# Altium PCB Internet Of Everthing.PcbDoc
Units mil, origin at the board's own origin, x right, y up, seen from the top; angles counter-clockwise.
Board outline 2472.44 x 1968.5 mil, 2 copper layers (Top Layer, Bottom Layer); 35 components, 31 nets, 136 pads, 45 vias.
Unrouted connection lines stored in the file: 2.
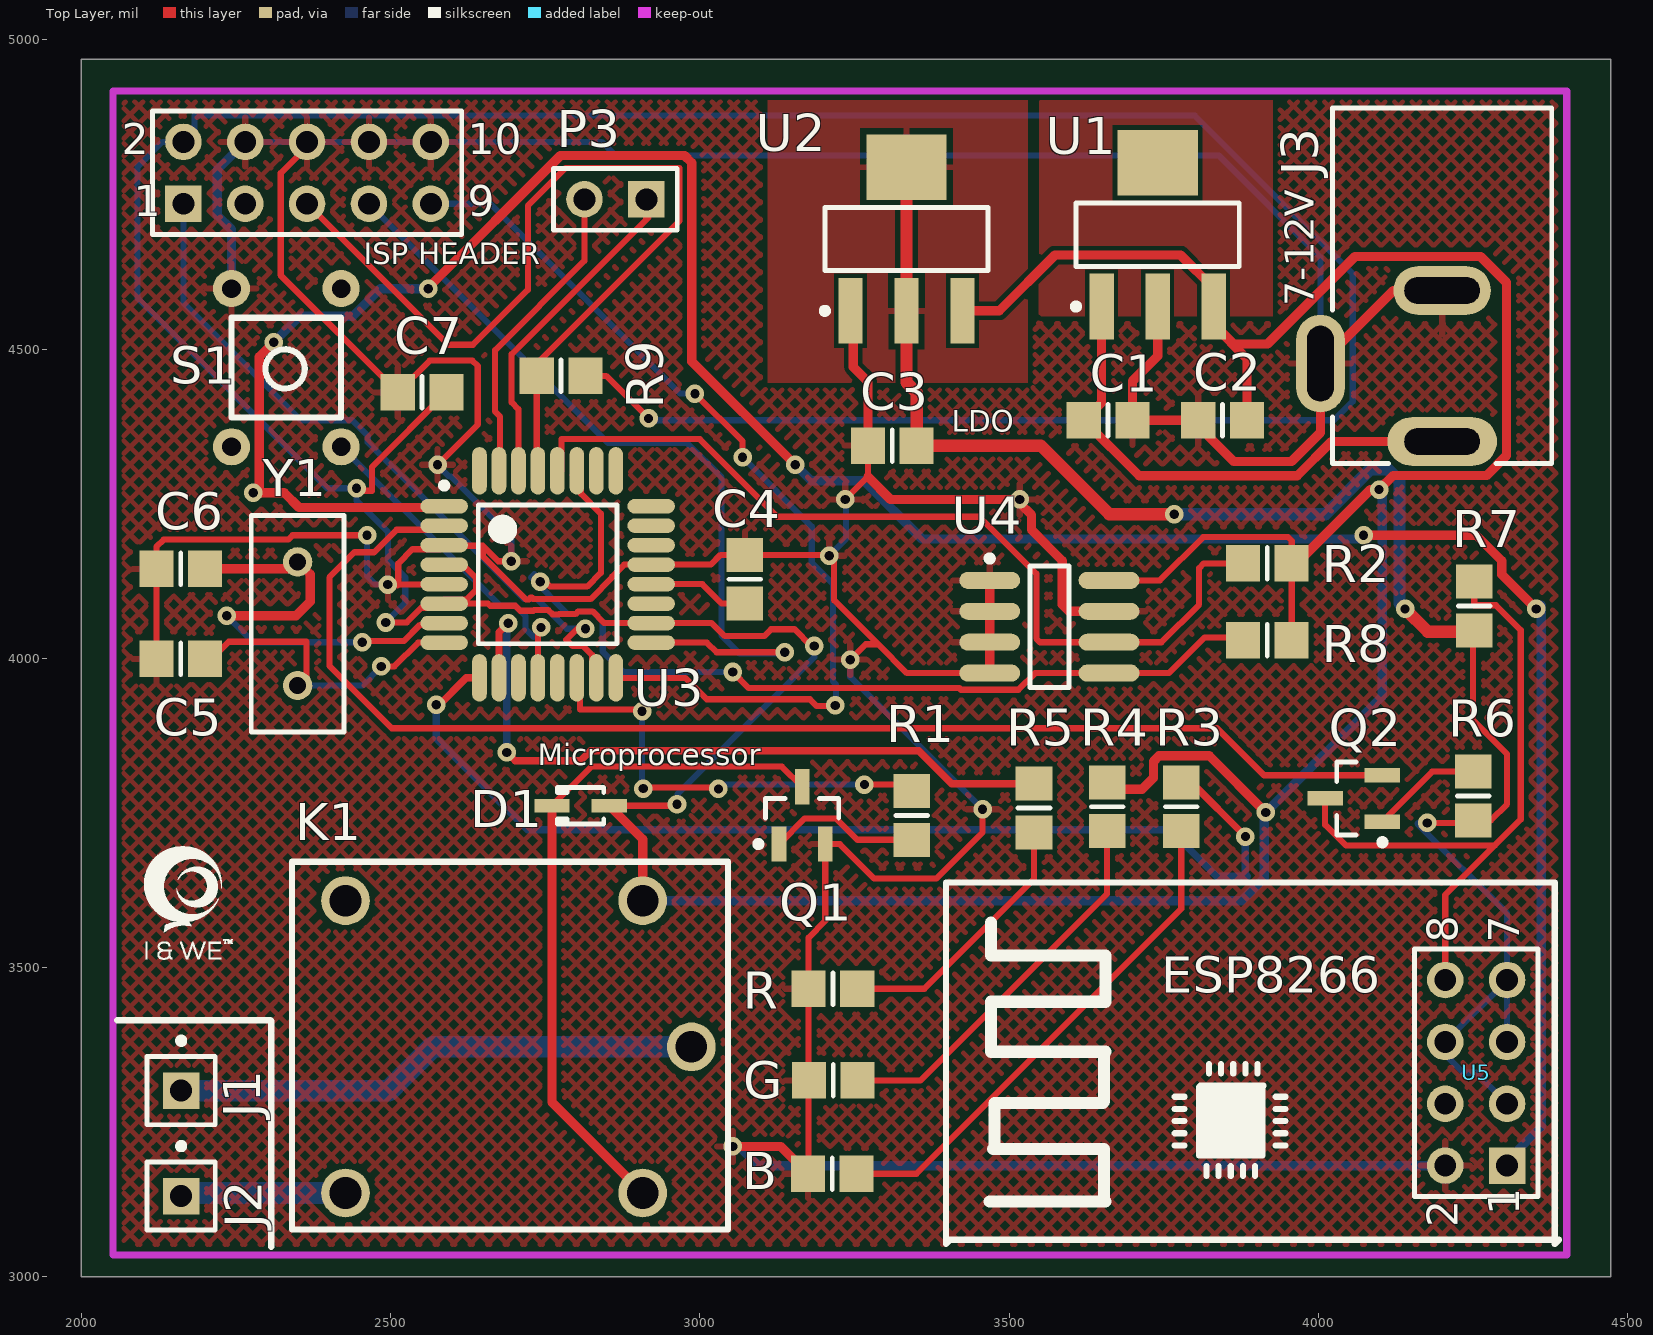
[diagram p0: Top Layer view]
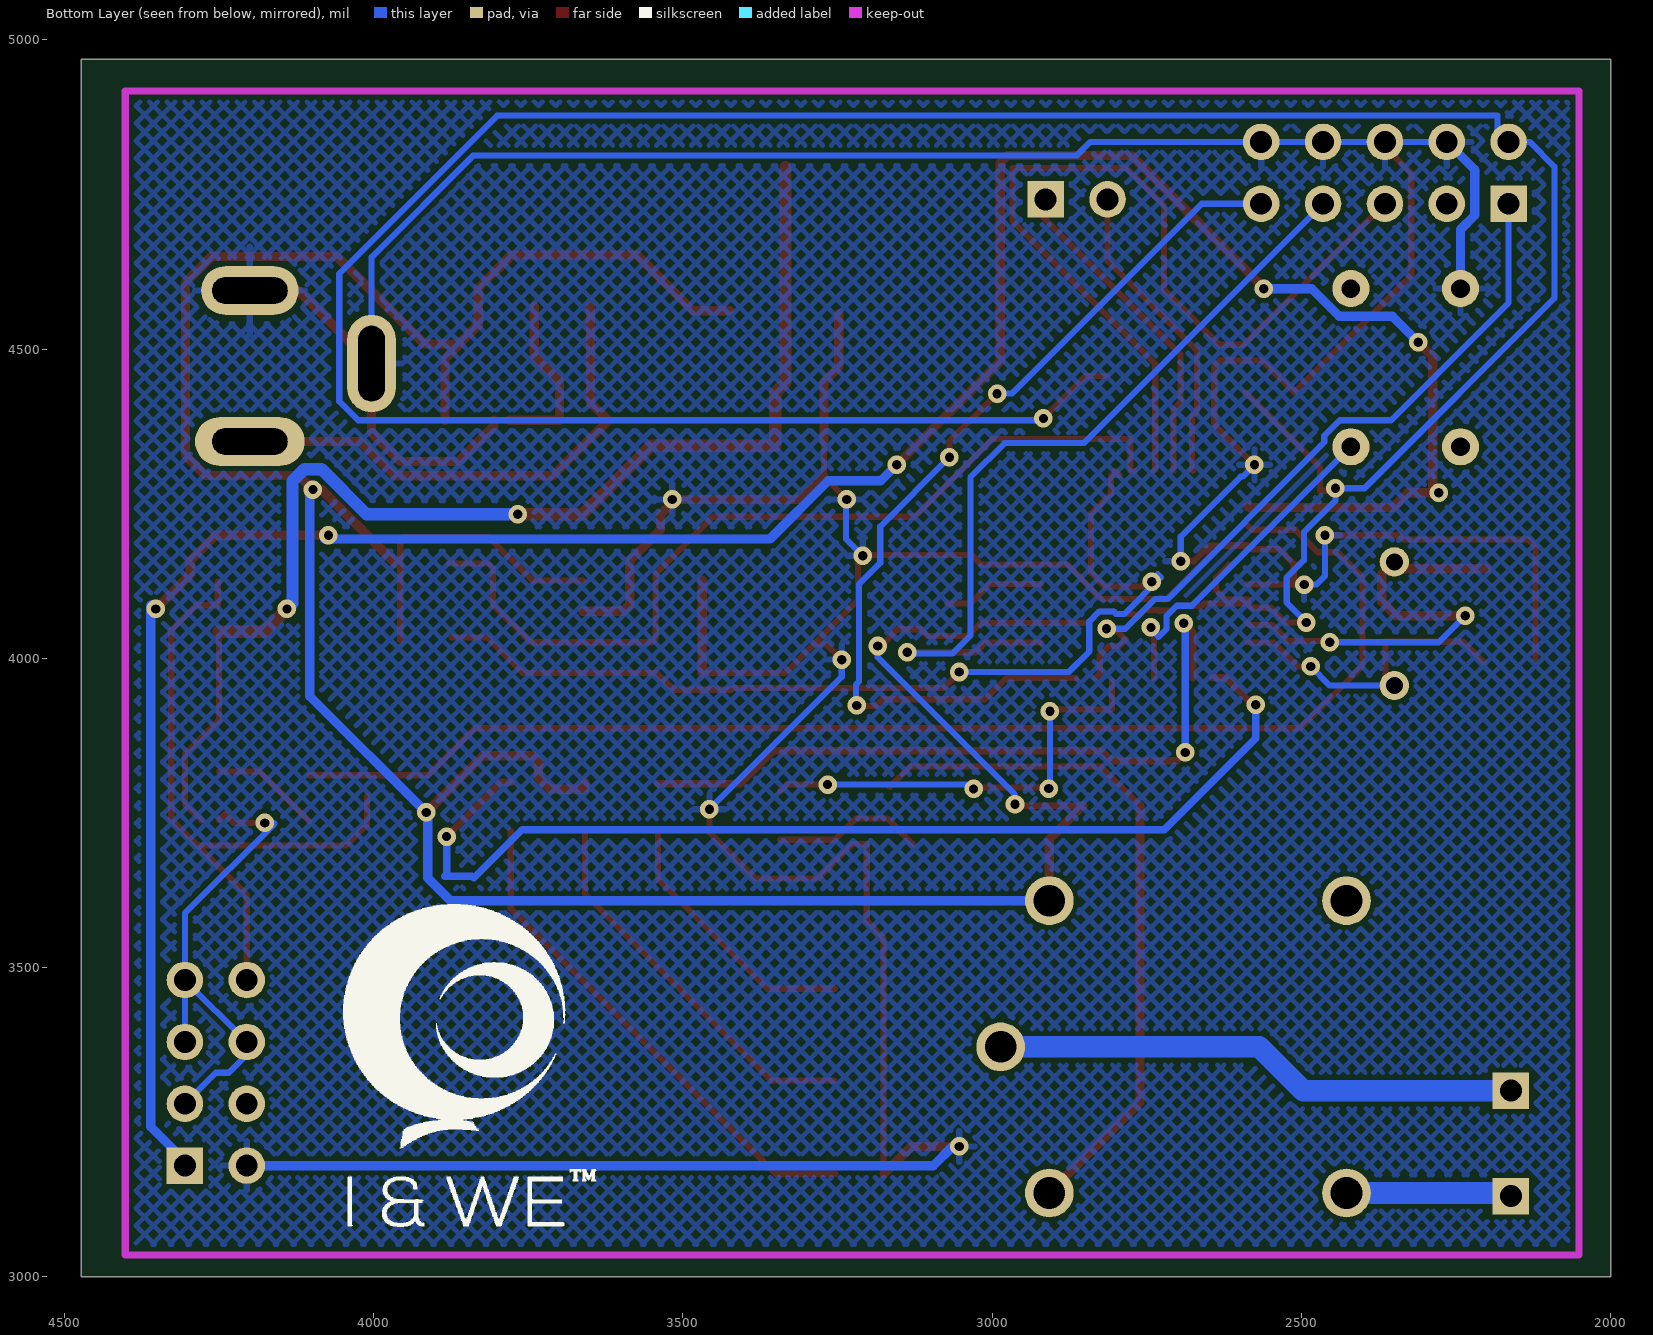
[diagram p1: Bottom Layer view, seen from below]

## Layer stack, top to bottom
Top Layer: signal copper 1.4
Dielectric: dielectric 12.6, FR-4, Dk 4.8
Bottom Layer: signal copper 1.4

## Board outline
2000,3000 4472.44,3000 4472.44,4968.5 2000,4968.5

## Design rules (kind name [scope] priority, off if disabled: settings)
Clearance [All] p1: gap=7.5
PolygonConnect [All] p1: connectstyle=Relief reliefconductorwidth=10 reliefentries=4 polygonreliefangle="90 Angle" airgapwidth=10
RoutingVias [All] p1: holewidth=15 width=30 viastyle="Through Hole" minholewidth=15 minwidth=30 maxholewidth=15 maxwidth=50
SolderMaskExpansion [All] p1: expansion=4
Width [All] p1: maxlimit=40 minlimit=8 preferedwidth=15
28 further rules are at their usual default settings.

## Components (designator, comment, footprint, x,y, rotation, side; value= is the part's Value field where it differs from the comment)
B "LED0" 6-0805_M 3214,3167 r180 top (schematic designator D2)
C1 "Cap" 6-0805_M 3660,4385 r180 top
C2 "Cap" 6-0805_M 3845,4385 r180 top
C3 "Cap" 6-0805_M 3311,4344 r180 top
C4 "Cap" 6-0805_M 3072.83,4127.95 r270 top
C5 "Cap" 6-0805_M 2160.79,3999.06 r180 top
C6 "Cap" 6-0805_M 2160.79,4144.73 r180 top
C7 "Cap" 6-0805_M 2551,4430 r0 top
D1 "1N4148" SOD-323 2807.09,3761.81 r180 top
G "LED0" 6-0805_M 3215.56,3317.85 r180 top (schematic designator D3)
"ISP HEADER" "ISP Header" HDR2X5 2165,4735 r0 top (schematic designator P2)
J1 "Socket" PIN1 2161.42,3301.18 r0 top
J2 "Socket" PIN1 2161.42,3130.83 r0 top
J3 "PWR2.5" KLD-0202 4200,4890 r270 top
K1 "Relay-SPDT" G5LA-141 2907.48,3608.27 r180 top
P3 "USART" HDR1X2 2913.39,4742.13 r180 top
Q1 "2N3904" SOT-23_M 3165.35,3746.06 r90 top
Q2 "2N3904" SOT-23_M 4057.09,3773.62 r180 top
R "LED0" 6-0805_M 3215,3466 r180 top (schematic designator D4)
R1 "Res2" 6-0805_M 3342.52,3746.06 r270 top
R2 "Res2" 6-0805_M 3917.32,4153.54 r0 top
R3 "Res2" 6-0805_M 3778.32,3760.09 r90 top
R4 "Res2" 6-0805_M 3658.24,3760.09 r90 top
R5 "Res2" 6-0805_M 3540.13,3758.13 r90 top
R6 "Res2" 6-0805_M 4250,3777.56 r90 top
R7 "Res2" 6-0805_M 4251.97,4084.65 r90 top
R8 "Res2" 6-0805_M 3917.32,4029.53 r0 top
R9 "g" 6-0805_M 2775.59,4456.69 r180 top
S1 "SW-PB" "Tactile Swithc" 2420,4342 r90 top
U1 "L7805CP" SOT223_M 3740,4685 r90 top
U2 "LM1117SX-3.3" SOT223_M 3334,4678 r90 top
U3 "ATmega328P-AU" 32A_M 2753.94,4135.83 r0 top
U4 "24C02C/SN" SOIC-SN8_M 3564.96,4051.18 r0 top
U5 "ESP8266" HDR2X4 4305,3180 r90 top
Y1 "16MHz" RAD-0.2 2349.76,4056.15 r90 top

## Footprints (in the part's own frame and the unit in brackets; to place one, negate y for a bottom-side part, rotate by r counter-clockwise, add the part's x,y. Pads: shape width x height; smd on the part's side, far side on the other; paste and mask are expansions set on the pad)
6-0805_M [mm] "Chip Resistor, Body 2.0x1.2mm, IPC Low Density"
  rect 1.4x1.5 smd: 1(-1,0) 2(1,0)
  silkscreen extent 0,-0.65 0,0.65, body extent -1.07,-0.7 1.07,0.7, height 0.7
32A_M [mm] "Thin QFP, 32-Leads, Body 7x7mm, Pitch 0.8mm, IPC Low Density"
  oval 1.95x0.6 smd: 1(-4.25,2.8) 2(-4.25,2) 3(-4.25,1.2) 4(-4.25,0.4) 5(-4.25,-0.4) 6(-4.25,-1.2) 7(-4.25,-2) 8(-4.25,-2.8) 17(4.25,-2.8) 18(4.25,-2) 19(4.25,-1.2) 20(4.25,-0.4) 21(4.25,0.4) 22(4.25,1.2) 23(4.25,2) 24(4.25,2.8)
  oval 0.6x1.95 smd: 9(-2.8,-4.25) 10(-2,-4.25) 11(-1.2,-4.25) 12(-0.4,-4.25) 13(0.4,-4.25) 14(1.2,-4.25) 15(2,-4.25) 16(2.8,-4.25) 25(2.8,4.25) 26(2,4.25) 27(1.2,4.25) 28(0.4,4.25) 29(-0.4,4.25) 30(-1.2,4.25) 31(-2,4.25) 32(-2.8,4.25)
  silkscreen extent -4.37,-2.85 2.85,3.77, body extent -3.5,-3.5 3.5,3.5, height 1.2
G5LA-141 [mm]
  round 2 hole 1.3: 1(-2,6) 2(12.2,0) 3(12.2,12) 4(0,0) 5(0,12)
  silkscreen extent -3.5,-1.6 14.4,13.5
HDR1X2 [mm] "Connector; Header; 2 Position"
  rect 1.5x1.5 hole 0.9: 1(0,0)
  round 1.5 hole 0.9: 2(2.54,0)
  silkscreen extent -1.27,-1.27 3.81,1.27
HDR2X4 [mm] "Connector; Header; 4x2 Position"
  rect 1.5x1.5 hole 0.9: 1(0,0)
  round 1.5 hole 0.9: 2(0,2.54) 3(2.54,0) 4(2.54,2.54) 5(5.08,0) 6(5.08,2.54) 7(7.62,0) 8(7.62,2.54)
  silkscreen extent -1.27,-1.27 8.89,3.81
HDR2X5 [mm] "Connector; Header; 5x2 Position"
  rect 1.5x1.5 hole 0.9: 1(0,0)
  round 1.5 hole 0.9: 2(0,2.54) 3(2.54,0) 4(2.54,2.54) 5(5.08,0) 6(5.08,2.54) 7(7.62,0) 8(7.62,2.54) 9(10.16,0) 10(10.16,2.54)
  silkscreen extent -1.27,-1.27 11.43,3.81
KLD-0202 [mm] "DC Power Jack, 2.5mm, KLD Series, PCB Mount"
  oval 2x4.5 hole 1.1 slot 3.1 at 90 deg: 1(13.7,0)
  round 0 all layers, no hole: 1A(13.7,-1.25) 1B(13.7,1.25) 2A(7.5,-1) 2B(7.5,1) 3A(9.5,-5) 3B(11.5,-5)
  oval 2x4 hole 1.1 slot 3.1 at 90 deg: 2(7.5,0)
  oval 4x2 hole 1.1 slot 3.1 at 0 deg: 3(10.5,-5)
  silkscreen extent 0,-4.5 14.6,4.5
PIN1 [mm] "Connector; Plug"
  rect 1.5x1.5 hole 0.9: 1(0,0)
  silkscreen extent -1.4,-1.4 1.4,2.17
RAD-0.2 [mm] "Radial Cap, Thru-Hole; 2 Leads; 0.2 in Pin Spacing"
  round 1.2 hole 0.7: 1(-2.54,0) 2(2.54,0)
  silkscreen extent -4.44,-1.91 4.45,1.9
SOD-323 [mm] "SOD-323/SC-76; 2 Leads; Body 1.7 x 1.3 mm, (LxW)"
  rect 1.45x0.55 smd: 1(1.175,0) 2(-1.175,0)
  silkscreen extent -0.95,-0.75 0.95,0.75
SOIC-SN8_M [mm] "SOIC, 8-Leads, Body 4.9x3.8mm, Pitch 1.27mm, IPC Low Density"
  oval 2.5x0.7 smd: 1(-2.45,1.905) 2(-2.45,0.635) 3(-2.45,-0.635) 4(-2.45,-1.905) 5(2.45,-1.905) 6(2.45,-0.635) 7(2.45,0.635) 8(2.45,1.905)
  silkscreen extent -2.57,-2.5 0.8,2.93, body extent -2,-2.5 2,2.5, height 1.75
SOT223_M [mm] "SOT223, 4-Leads, Body 6.5x3.5mm, Pitch 2.3mm, Lead Span 7mm, IPC Low Density"
  rect 2.7x1 smd: 1(-2.95,2.3) 2(-2.95,0) 3(-2.95,-2.3)
  rect 2.7x3.3 smd: 4(2.95,0)
  silkscreen extent -3.07,-3.35 1.3,3.47, body extent -1.85,-3.35 1.85,3.35, height 1.7
SOT-23_M [mm] "SOT23, 3-Leads, Body 2.9x1.3mm, Pitch 0.95mm, Lead Span 2.3mm, IPC Low Density"
  rect 1.45x0.6 smd: 1(-1.175,0.95) 2(-1.175,-0.95) 3(1.175,0)
  silkscreen extent -1.3,-1.5 0.7,1.92, body extent -0.7,-1.5 0.7,1.5, height 1.11
"Tactile Swithc" [mil]
  round 60 hole 30: 1(0,0) 2(255.91,177.17) ""(0,177.17) ""(255.91,0)
  silkscreen extent 47,0 209,177

## Part data
B G R: "Typical INFRARED GaAs LED"
C1 C2 C3 C4 C5 C6 C7: "Capacitor"
D1: "High Conductance Fast Diode"
"ISP HEADER": library part "Header 5X2", "Header, 5-Pin, Dual row"
J3: "Low Voltage Power Supply Connector"
K1: "Single-Pole Dual-Throw Relay"
P3: library part "Header 2", "Header, 2-Pin"
Q1 Q2: "NPN General Purpose Amplifier"
R1 R2 R3 R4 R5 R6 R7 R8: "Resistor"
R9: library part Res2, "Resistor"
S1: "Switch"
U1: "Positive Voltage Regulator"
U2: "800mA Low-Dropout Linear Regulator, 3-pin TO-263"
U3: "8-bit AVR Microcontroller, 32KB Flash, 1KB EEPROM, 2KB SRAM, 32-pin TQFP, Industrial Grade (-40°C to 85°C)"
U4: "2Kbit, 400kHz, 5V, I2C Serial EEPROM, 8-Pin SOIC 150mil, Commercial Temperature"
U5: "Low cost, Wi-Fi module"
Y1: library part XTAL, "Crystal Oscillator"

## Via types
v1: diameter 30, hole 15, Top Layer to Bottom Layer, 45 vias

## Nets (pads, with @x,y where several pads share a name; then routed paths per layer and width w, separated by ;. In a path a pad name is that pad's centre, name@x,y a point inside that pad or via, vN(x,y) a via of type N, cw(c..) or ccw(c..) an arc to the next point about the centre after c; other vN are vias at no path point)
3V3: C3.1 R6.1 R7.1 U2.2 U2.4 U5.3 U5.5 U5.6 U5.7 | length 2804.6
  Top Layer w10: v1(4176,3734) 4226.19,3734 4240.19,3748 R6.1 ; R7.1@4250,4043.31 4250,3900.02 4305,3845.02 4305,3764.47 R6.1@4278.72,3738.19
  Top Layer w20: U2.4 U2.2 3334,4446 3350.37,4429.63 C3.1 3551,4344 3662,4233 v1(3767,4233) ; v1(4140,4080) 4176.69,4043.31 R7.1@4250,4043.31
  Bottom Layer w10: v1(4176,3734) 4161,3734 4160,3733 4305,3588 U5.7 ; U5.3 4255,3330 4234,3330 4205,3359 U5.6 U5.7 ; U5.5 U5.7
  Bottom Layer w20: v1(3767,4233) 4011.33,4233 4084.33,4306 4111.67,4306 4131,4286.67 4131,4089 v1(4140,4080)
5V0: "ISP HEADER.2" C2.1 C7.2 D1.2 K1.4 R2.2 R4.2 R8.2 R9.1 U1.3 U2.3 U3.4 U3.6 U3.18 U4.8 | length 10826.6
  Top Layer w10: v1(2445,4275) 2449,4271 2470,4271 2470,4309.63 C7.2 ; v1(2492,4058) 2526,4058 2525.93,4058.07 2549.76,4081.9 2579.93,4081.9 U3.6 ; U3.4@2616.78,4151.57 2638,4130.36 2638,4109.8 2623.47,4095.27 2586.61,4095.27 U3.6 ; R9.1 2848.31,4456.69 v1(2917,4388) ; D1.2 2960.81,3761.81 v1(2963,3764) ; v1(3185,4020) 3180,4020 3153,4047 3115,4047 3104,4036 3040,4036 3018.91,4057.09 2845.51,4057.09 2826.6,4076 2803.4,4076 2799,4071.6 2772.4,4071.6 2771.8,4071 2761.85,4071 2754.85,4078 2731.65,4078 2730.65,4077 2709.6,4077 2701.6,4085 2661,4085 2657.42,4088.58 U3.6 ; U4.8 3743.64,4126.18 3813.53,4196.07 3950.93,4196.07 3956.69,4190.31 R2.2 R8.2
  Top Layer w15: D1.2 2907.48,3707.68 K1.4 ; U2.3 3483.86,4561.86 3574,4652 3777,4652 3830.55,4598.45 U1.3 U1.3@3830.55,4540.45 ; R4.2 3658.24,3788.24 3714.7,3788.24 3733.29,3806.82 3733.29,3833.44 3742.37,3842.52 3823.48,3842.52 v1(3915,3751) ; C2.1 3884.37,4484.63 3830.55,4538.45 U1.3@3830.55,4540.45 ; R2.2@3964.54,4153.54 4084,4273 v1(4098,4273) 4120.76,4295.76 4271.94,4295.76 4304.08,4327.9 4304.08,4607.61 4262.1,4649.59 4059.16,4649.59 3917.78,4508.21 3862.79,4508.21 U1.3@3830.55,4540.45
  Bottom Layer w10: v1(2492,4058) 2492,4058.53 2523.62,4090.16 2523.62,4130.98 2496,4158.6 2496,4203.89 2445,4254.89 v1(2445,4275) 2398,4275 2091,4582 2091,4795 2131,4835 2165,4835 2183,4835 2183,4877.53 3799.93,4877.53 4055.52,4621.94 4055.52,4415.55 4024.84,4384.87 2917,4384.87 v1(2917,4388) ; v1(2963,3764) 2964,3765 2964,3781 3185,4002 v1(3185,4020)
  Bottom Layer w15: K1.4 3875.67,3608.27 3912.5,3645.09 3912.5,3748.5 v1(3915,3751) 4103,3939 4103,4268 v1(4098,4273)
GND: "ISP HEADER.4" "ISP HEADER.6" "ISP HEADER.8" "ISP HEADER.10" B.2 C1.1 C2.2 C3.2 C4.1 C5.2 C6.2 C7.1 G.2 J3.2 J3.2A J3.2B J3.3 J3.3A J3.3B Q1.2 R.2 S1.2 U1.2 U2.1 U3.3 U3.5 U3.21 U4.1 U4.2 U4.3 U4.4 U4.7 U5.2 | length 9867.4
  Top Layer w10: C5.2 C6.2 2121.42,4180.42 2132.99,4191.99 2334.52,4191.99 2341.53,4199 v1(2462,4199) ; 2365,4827 2322.47,4784.47 2322.47,4620.47 2321.82,4619.81 C7.1 2563,4481.37 2632.37,4481.37 2641,4472.74 2641,4378 v1(2576,4313) ; v1(2495.62,4119.38) 2512.38,4119.38 ; 2511,4118 2512.38,4119.38 ; U3.5 2585.91,4119.38 2512.38,4119.38 ; U3.3@2587.69,4182 2649,4182 2649,4165.4 2719.4,4095 2723.2,4095 2726.2,4098 2728.4,4098 2730.4,4096 2823.2,4096 2858,4130.8 2858,4132 2877.57,4151.57 3017.57,4151.57 3033.32,4167.32 C4.1 3207.68,4167.32 v1(3209,4166) 3217,4158 3217,4094 3288,4023 ; U3.3@2622.51,4183.07 U3.3 2579.93,4176.39 2535.39,4176.39 2512.38,4153.38 2512.38,4119.38 ; 2650,4181 2674,4157 v1(2695,4157) ; B.2 3175.63,3168 R.2 3175.63,3548.63 3202.76,3575.76 Q1.2 3226.2,3699.8 3282,3644 3382,3644 3457,3719 v1(3457,3756) ; v1(3235,4257) 3271.63,4293.63 C3.2 C3.2@3271.63,4352 ; v1(3243,3998) 3268,4023 3288,4023 ; U4.4 3334.82,3976.18 3288,4023
  Top Layer w15: v1(3053,3211) 3130.63,3211 B.2 ; U2.1@3248,4557.31 3248,4470.98 3271.63,4447.35 C3.2@3271.63,4352 ; 3271.63,4293.63 3308.26,4257 v1(3517,4257) ; U4.4 U4.3 U4.2 U4.1 ; v1@3517,4251 3536,4232 3536,4208 3586,4158 3586,4087 3596.82,4076.18 U4.7 ; U1.2 3740,4489 3699.37,4448.37 C1.1 C2.2@3780.63,4385 ; C2.2 3805.63,4375.65 3863,4318.28 3956.28,4318.28 4003.15,4365.15 J3.3B ; J3.3A 4022.83,4496.3 J3.3 4121.26,4594.72 J3.2A
  Bottom Layer w10: 2265,4835 2365,4835 2465,4835 2565,4835 2841,4835 2863,4813 3839,4813 4003.15,4648.85 J3.3 ; v1(2462,4199) 2462,4133 2475.62,4119.38 v1(2495.62,4119.38) ; v1(2576,4313) 2595,4294 2598,4294 2695,4197 v1(2695,4157) ; v1(3209,4166) 3236,4193 3236,4257 v1(3235,4257) ; v1(3243,3998) 3243,3970 v1(3457,3756)
  Bottom Layer w15: S1.2 2242.83,4693.49 2219.97,4716.35 2219.97,4789.97 2265,4835 ; v1(3053,3211) 3064,3211 3095,3180 U5.2
LED1: R3.2 U3.9 | length 1762.6
  Top Layer w12: v1(2574,3925) 2577,3923 2622.5,3968.5 U3.9 ; R3.2 3794.54,3799.46 v1(3882,3712)
  Bottom Layer w12: v1@2568,3919 v1(2574,3925) 2574,3871 2722,3723 3760,3723 3838,3645 3841,3648 3885,3648 3882,3651 v1(3882,3712)
LED2: R5.2 U3.10 | length 1196.9
  Top Layer w12: U3.10 2675.2,4042.2 v1(2690,4057) ; v1(2688,3848) 2701.13,3834.87 2807.72,3834.87 2823.85,3851 3353.84,3851 3407.34,3797.5 R5.2
  Bottom Layer w12: v1(2688,3848) 2688,4058 2690,4060 v1(2690,4057)
LOAD: R1.1 U3.14 | length 722.1
  Top Layer w10: U3.14@2806,3963.69 2806,3917.62 2903.38,3917.62 v1(2906.5,3914.5) ; v1(2908.5,3789.5) 2910.5,3791.5 3027.5,3791.5 v1(3030,3789) ; v1(3266,3796) 3331.95,3796 R1.1
  Bottom Layer w10: v1(2906.5,3914.5) 2906.5,3790.5 2908.5,3790.5 v1(2908.5,3789.5) ; v1(3030,3789) 3030,3796 v1(3266,3796)
MISO: "ISP HEADER.9" U3.16 | length 1525.7
  Top Layer w10: U3.16 2976.5,3968.5 3011,3934 3178,3934 3189,3923 3218,3923 v1(3219,3924) ; v1(2992,4428) 3069,4351 v1(3069,4325)
  Bottom Layer w10: 2565,4735 2661,4735 2968,4428 v1(2992,4428) ; v1(3069,4325) 3181,4213 3181,4154.4 3215,4120.4 3215,3963 3220,3958 v1@3220,3925
MOSI: "ISP HEADER.1" U3.15 | length 1164.7
  Top Layer w10: v1(2815,4048) 2802,4048 2784,4030 2794.11,4019.89 2811.46,4019.89 2825.99,4005.36 2825.99,3975.19 U3.15
  Bottom Layer w10: 2165,4735 2165,4575 2355,4385 2437.81,4385 2463,4359.81 2463,4349.4 2716.4,4096 2736.85,4096 2784.85,4048 v1(2815,4048)
NC: "ISP HEADER.3"
NetC1_2: C1.2 J3.1 J3.1A J3.1B U1.1 | length 786.2
  Top Layer w15: U1.1 3649.45,4413.82 C1.2 3620.63,4384.73 3710.08,4295.28 3965.81,4295.28 4021.16,4350.63 J3.1A
NetC4_2: C4.2 U3.20 | length 164.6
  Top Layer w10: U3.20 3003.92,4120.08 3035.42,4088.58 C4.2
NetC5_1: C5.1 U3.8 Y1.1 | length 514.8
  Top Layer w10: C5.1@2205.22,3994 2238.22,4027 2364,4027 2364,3970.39 Y1.1 ; v1(2485,3987) 2505.78,3987 2544.37,4025.59 U3.8
  Bottom Layer w10: Y1.1 2454.15,3956.15 v1(2485,3987)
NetC6_1: C6.1 U3.7 Y1.2 | length 753.7
  Top Layer w10: v1(2454,4026) 2456,4028 2521.32,4028 2547.32,4054 2583.53,4054 U3.7
  Top Layer w15: C6.1 2338.35,4144.73 Y1.2 2370,4135.91 2370,4092 2347,4069 v1(2235,4069)
  Bottom Layer w10: v1(2235,4069) 2278,4026 v1(2454,4026)
NetD1_1: D1.1 K1.5 Q1.3 | length 1131
  Top Layer w10: D1.1 2824.01,3825 3132.68,3825 Q1.3
  Top Layer w15: D1.1 2760.83,3282.48 K1.5
NetD2_1: B.1 R3.1 | length 827.8
  Top Layer w10: B.1 3350,3167 3778.32,3595.32 R3.1
NetD3_1: G.1 R4.1 | length 629.6
  Top Layer w10: G.1 3356.85,3317.85 3658.24,3619.24 R4.1
NetD4_1: R5.1 R.1 | length 434.8
  Top Layer w10: R.1 3363,3466 3540.13,3643.13 R5.1
NetJ1_1: J1.1 K1.1 | length 854.2
  Bottom Layer w35: J1.1 2497.18,3301.18 2568.05,3372.05 K1.1
NetJ2_1: J2.1 K1.3 | length 267.8
  Bottom Layer w35: J2.1 2166.42,3135.83 K1.3
NetQ1_1: Q1.1 R1.2 | length 246.1
  Top Layer w10: Q1.1 3169.5,3741.35 3219.95,3741.35 3254.61,3706.69 R1.2
NetQ2_1: Q2.1 R6.2 | length 180.1
  Top Layer w10: Q2.1 4184.06,3816.93 R6.2
NetS1_1: S1.1 U3.12 | length 555.8
  Top Layer w10: U3.12 2738.19,4048.19 2740,4050 v1(2743.25,4050)
  Bottom Layer w10: S1.1 2677,4085 2701.6,4085 2718,4068.6 2718,4048 2731,4035 2743.25,4047.25 v1(2743.25,4050)
NetU3_1: U3.1 U5.1 | length 4204.3
  Top Layer w15: v1(2311,4511) 2287.83,4487.83 2287.83,4277.83 v1(2278,4268) 2328,4268 2352,4244 2584.55,4244 U3.1 ; v1(2561,4597.47) 2561,4599.28 2774.72,4813 2975.28,4813 2987,4801.28 2987,4480.05 v1(3154.05,4313) ; v1(4073,4199) 4255.28,4199 4296.5,4157.79 4296.5,4135.5 v1(4352,4080)
  Bottom Layer w15: v1(2311,4511) 2352.91,4552.91 2438.64,4552.91 2483.2,4597.47 v1(2561,4597.47) ; v1(3154.05,4313) 3180.05,4287 3265,4287 3359,4193 4079,4193 v1(4073,4199) ; U5.1 4305,3188 4360,3243 4360,4086 4358,4086 v1(4352,4080)
RST: "ISP HEADER.5" R9.2 U3.29 | length 1480.8
  Top Layer w10: 2365,4735 2593,4507 2633,4507 2722,4596 2722,4732 2783,4793 2967,4793 2967,4707 2736.22,4476.22 R9.2 2736.22,4305.12 U3.29@2738.19,4303.15
RX: P3.1 U3.30 | length 538.9
  Top Layer w10: U3.30@2706.69,4303.15 2706.69,4403.13 2695.66,4414.17 2695.66,4491.61 2917.06,4713 2913.39,4713 P3.1
S_RX: Q2.3 R7.2 U5.8 | length 1080.1
  Top Layer w10: Q2.3@4010.83,3777.24 Q2.3 4010.83,3731.17 4044.37,3697.63 4284.91,3697.63 ; U5.8 4205,3617.72 4284.91,3697.63 ; R7.2 4251.97,4085.83 4286.88,4085.83 4327,4045.71 4327,3739.72 4284.91,3697.63
S_TX: Q2.2 U3.2 | length 2138.9
  Top Layer w10: U3.2 2579.93,4207.88 2509.77,4207.88 2473.39,4171.5 2441.5,4171.5 2401,4131 2401,3988 2502,3887 3836,3887 3911.98,3811.02 Q2.2
SCK: "ISP HEADER.7" U3.17 | length 1345.9
  Top Layer w10: U3.17 3011.41,4025.59 3027,4010 v1(3137,4010)
  Bottom Layer w10: 2465,4735 2852,4348 2979.6,4348 3035,4292.6 3035,4037 3064,4008 3135,4008 v1(3137,4010)
SCL: R2.1 U3.28 U4.6 | length 1444.5
  Top Layer w10: U3.28@2769.69,4303.15 2776.37,4303.15 2776.37,4354.54 2999.87,4354.54 3125.4,4229 3452,4229 3544,4137 3544,4032 3549.82,4026.18 U4.6 3746.18,4026.18 3807,4087 3807,4146 3814.54,4153.54 R2.1
SDA: R8.1 U3.27 U4.5 | length 1616.5
  Top Layer w10: v1(2742,4124) 2750,4124 2758,4116 2817.74,4116 2840,4138.26 2840,4234.16 2807.87,4266.3 2807.87,4296.46 2794.5,4296.46 U3.27@2801.18,4303.15 ; v1(3053,3978) 3079,3952 3419.38,3952 3421.98,3949.4 3515.03,3949.4 3541.81,3976.18 U4.5 3758.18,3976.18 3816,4034 R8.1@3873.48,4034
  Bottom Layer w10: v1(2742,4124) 2742,4126.3 2732.3,4136 2727.3,4131 2786.71,4071.6 2799,4071.6 2803.4,4076 2826.6,4076 2843,4059.6 2843,4011 2876,3978 v1(3053,3978)
TX: P3.2 U3.31 | length 502.8
  Top Layer w10: U3.31@2675.2,4303.15 2677,4304.95 2677,4391 2669,4399 2669,4498.4 2813.39,4642.79 P3.2
pads on no net: K1.2 S1. U1.4 U3.11 U3.13 U3.19 U3.22 U3.23 U3.24 U3.25 U3.26 U3.32 U5.4

## Polygon pours and split planes (outlines as drawn)
GND on Top Layer "Top Layer-No Net" (hatched 45Degree grid 20 track 8, pour order 18): 2051.18,4917.32 4401.57,4917.32 4401.57,3035.43 2051.18,3035.43
3V3 on Top Layer "Top Layer-No Net 1" (solid, pour order 17): 3549,4903 3550,4902 3926,4902 3926,4553 3548,4553
3V3 on Top Layer "Top Layer-No Net 1" (solid, pour order 15): 3110,4902 3530,4902 3530,4446 3110,4446
GND on Bottom Layer "Top Layer-No Net 1" (hatched 45Degree grid 20 track 8, pour order 13): 2051.18,4917.32 4401.57,4917.32 4401.57,3035.43 2051.18,3035.43

## Keep-outs
Keep-Out Layer:
  lines w11.81: 2051.18,3035.43 2051.18,4917.32 4401.57,4917.32 4401.57,3035.43 2051.18,3035.43

## Silkscreen, mask and mechanical layers (free items; w line width, h text height)
Top Overlay:
  drawing of 1625 lines, arcs and shapes, not listed
  text "7-12V" at 4007.42,4569.35 h80 r90
  text "LDO" at 3407,4354 h60
  text "Microprocessor" at 2738,3815 h60
  text "ESP8266" at 3746,3440 h100
Bottom Overlay:
  drawing of 1549 lines, arcs and shapes, not listed
Drill Drawing:
  text ".LEGEND" at 4955.91,3200 h60
  text "Drill Drawing." at 4955.91,3100 h60

## Dimensions
2051.18,3035.43 to 2051.18,4917.32 on Mechanical 1
2051.18,3035.43 to 4401.57,3035.43 on Mechanical 1

## Text inside footprints (layer, text, board x,y; h text height)
"ISP HEADER": Top Overlay "10" at 2625,4815 h50; Top Overlay "9" at 2625,4715 h50; Top Overlay "1" at 2085,4715 h50; Top Overlay "2" at 2065,4815 h50
U5: Top Overlay "2" at 4225,3080 h50 r90; Top Overlay "1" at 4325,3100 h50 r90; Top Overlay "7" at 4325,3540 h50 r90; Top Overlay "8" at 4225,3540 h50 r90